# EAGLE board bluepill-knx-transceiver (EAGLE 9.0.1)
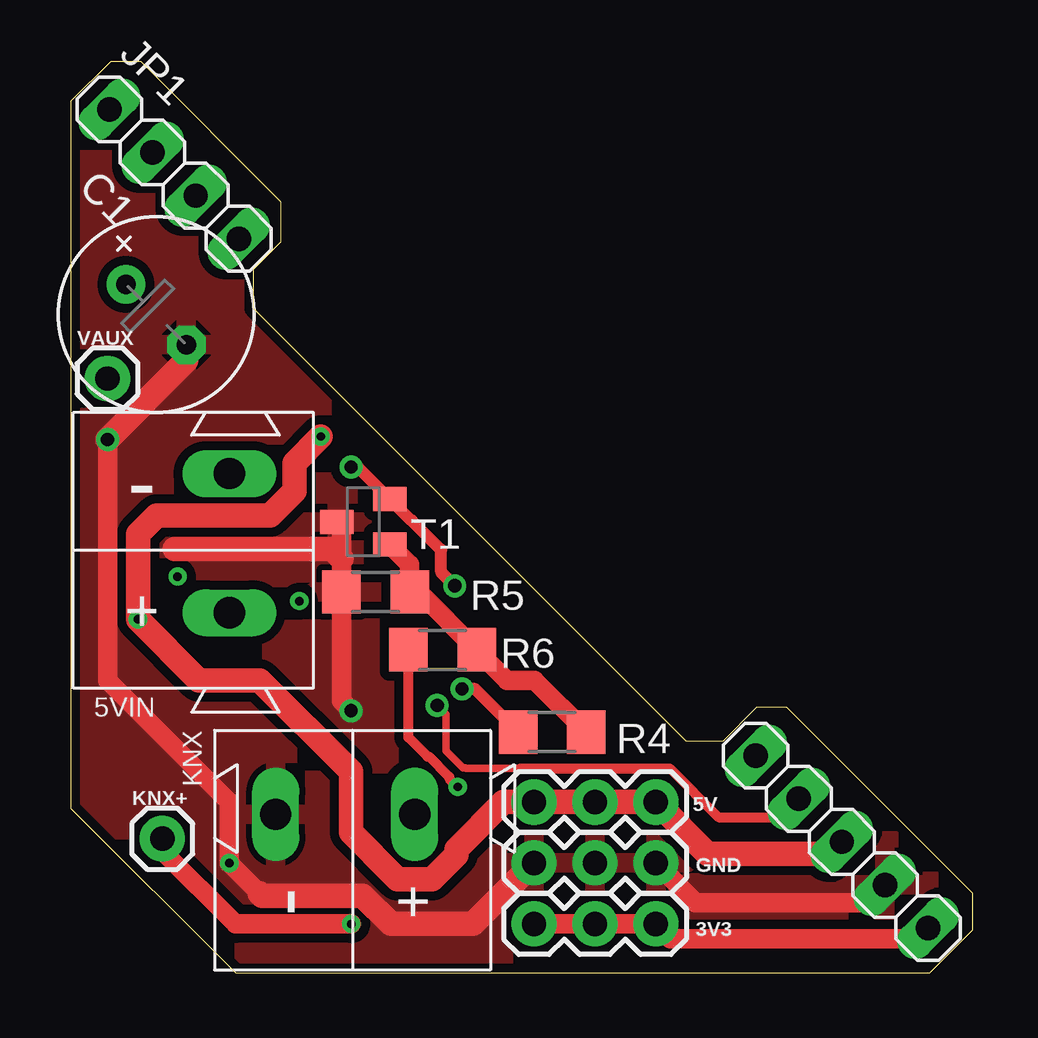
[diagram p0: board, top side]
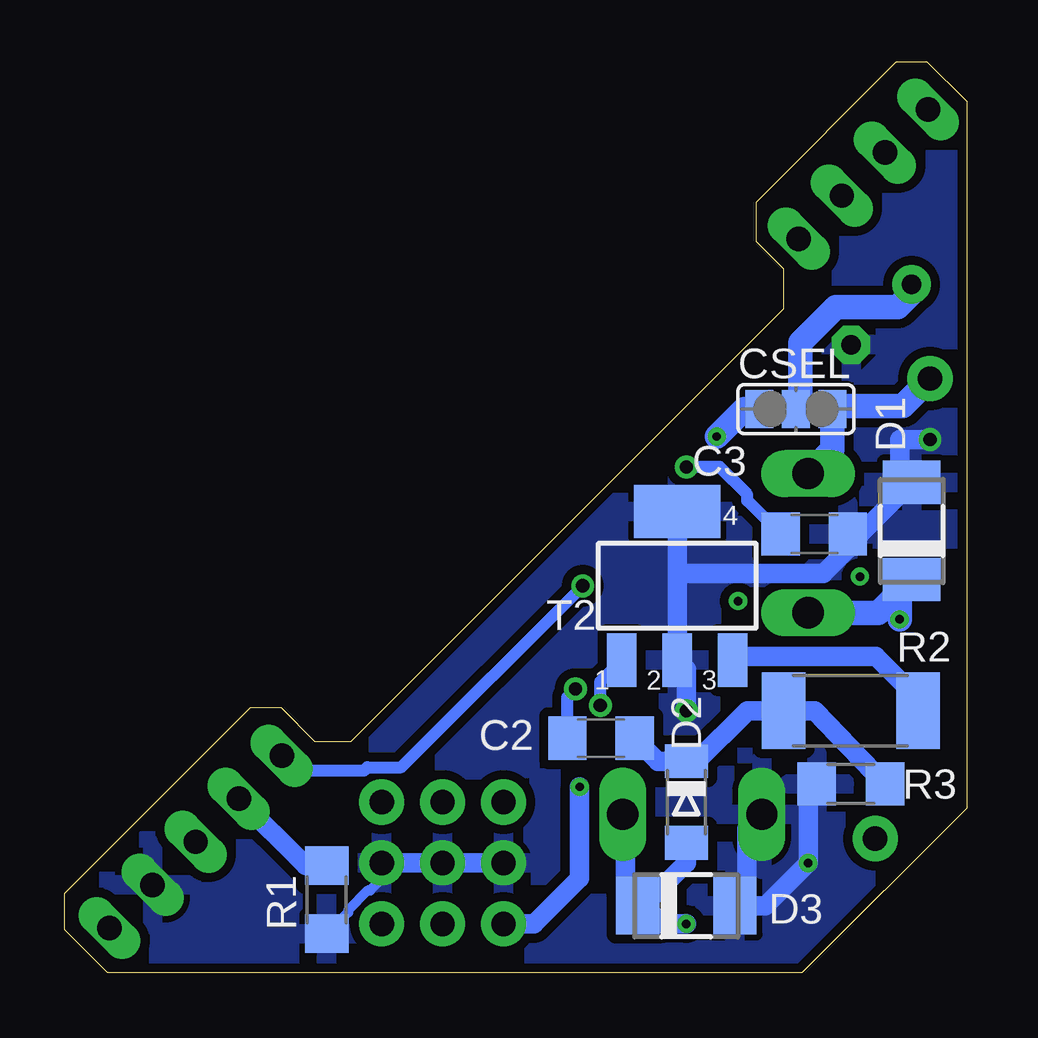
[diagram p1: board, bottom side, seen from below]

Size 37.59 x 37.97 mm. Coordinates in mm from the lower left corner, seen from the top.
Outline: 0,36.32 0,6.86 6.86,0 35.81,0 37.59,1.78 37.59,3.3 29.85,11.05 28.57,11.05 27.18,9.65 25.65,9.65 7.62,27.69 7.62,29.34 8.76,30.48 8.76,32.13 2.92,37.97 1.65,37.97 0,36.32
Copper layers (1*16): Top 0.035mm / dielectric 1.5mm / Bottom 0.035mm
Design rules "default *": minimum track width 10mil, minimum drill 0.35mm, track to track 10mil, track to pad 10mil, pad to pad 10mil, via to via 10mil, smd to smd 10mil, copper to edge 15mil, drill to drill 10mil, minimum pad ring 10mil, minimum via ring 8mil, stop-mask expansion 4mil, vias tented up to drill 100mil, thermal gap 10mil
Net classes: 1 power: width 0.305 mm

## Footprints (pad centres in the part's own frame; a part is rotated, then mirrored left to right if it is on the bottom)
1X03 = drill 1.016 pad 1.88: 1 0,0; 2 2.54,0; 3 5.08,0
WAGO-243-211 = drill 1.3 long: 1+ 0,2.65; 2- 0,-3.15
E3,5-8 = drill 0.813 pad 1.6: + -1.778,0 | drill 0.813 pad 1.6 octagon: - 1.778,0
C1206 = smd 1.6 x 1.8: 1 -1.4,0; 2 1.4,0
SJ_2 = smd 1.168 x 1.6: 1 -1.524,0; 2 0,0; 3 1.524,0
DO-214AC = smd 1.8 x 2.4: A 2.025,0; C -2.025,0
MINIMELF = smd 1.4 x 1.8: A 1.7,0; C -1.7,0
1X20-BP = drill 1.016 long: 1 -24.13,0; 2 -21.59,0; 3 -19.05,0; 4 -16.51,0; 16 13.97,0; 17 16.51,0; 18 19.05,0; 19 21.59,0; 20 24.13,0
1X01 = drill 1.016 pad 1.88: 1 0,0
R1206 = smd 1.6 x 1.803: 1 -1.422,0; 2 1.422,0
R2512 = smd 1.8 x 3.2: 1 -2.8,0; 2 2.8,0
SOT23-BEC = smd 1 x 1.4: B -0.95,-1.1; C 0,1.1; E 0.95,-1.1
SOT223 = smd 1.219 x 2.235: 1 -2.311,-3.099; 2 0,-3.099; 3 2.311,-3.099 | smd 3.6 x 2.2: 4 0,3.099

## Placement (x,y rotation side)
3V3  [1X03]  19.3,2.03 0 top
5V  [1X03]  19.3,7.11 0 top
5VIN  WAGO-243-211  [WAGO-243-211]  6.6,17.65 180 top
C1  [E3,5-8]  3.56,27.43 315 top
C2  100n  [C1206]  15.24,9.78 180 bottom
C3  100p  [C1206]  6.35,18.29 180 bottom
CSEL  [SJ_2]  7.11,23.49 0 bottom
D1  SMAJ5.0CA  [DO-214AC]  2.29,18.41 90 bottom
D2  1N4148  [MINIMELF]  11.68,7.11 270 bottom
D3  SMAJ40CA  [DO-214AC]  11.68,2.79 0 bottom
GND  [1X03]  19.3,4.57 0 top
JP1  [1X20-BP]  18.67,18.92 315 top
KNX  WAGO-243-211  [WAGO-243-211]  11.68,6.6 270 top
KNX+  [1X01]  3.81,5.59 0 top
R1  10k  [R1206]  26.67,3.05 90 bottom
R2  68R 1W  [R2512]  4.83,10.92 180 bottom
R3  100k  [R1206]  4.83,7.87 0 bottom
R4  10k  [R1206]  20.07,10.03 0 top
R5  47k  [R1206]  12.7,15.88 0 top
R6  82k  [R1206]  15.49,13.46 180 top
T1  BC856  [SOT23-BEC]  12.19,18.8 90 top
T2  IRLL110  [SOT223]  12.07,16.13 0 bottom
VAUX  [1X01]  1.52,24.77 0 top

## Library data of the parts
3V3 5V GND KNX+ VAUX = SparkFun-Connectors
5VIN KNX = Connector_for_Selfbus-Projects
C1 = rcl; SPICEPREFIX: C
C2 = rcl; REICHELT: X7R-G0805 100N
C3 = rcl; REICHELT: NPO-G0805 100P
CSEL = jumper
D1 D3 = diode
D2 = diode; REICHELT: 1N 4148 SMD
JP1 = pinhead-1
R1 R5 = rcl; REICHELT: SMD-0805 47,0K
R2 = rcl; SPICEPREFIX: R
R3 = rcl; REICHELT: SMD-0805 100K
R4 = rcl; REICHELT: SMD-0805 10,0K
R6 = rcl; REICHELT: SMD-0805 82,0K
T1 = transistor-pnp; REICHELT: BC 856B SMD
T2 = zetex; OC_FARNELL: unknown; OC_NEWARK: unknown

## Nets
5V: 5V.1 5V.2 5V.3 5VIN.1+ CSEL.1 D1.C JP1.18
+3V3: 3V3.1 3V3.2 3V3.3 JP1.20 R6.2
EIB+ [power]: D2.A D3.C KNX+.1 KNX.1+
GND: C1.- C3.1 D1.A D3.A GND.1 GND.2 GND.3 JP1.19 KNX.2- R1.1 R3.1 R5.1 T1.C T2.2 T2.4
KNX+D: C2.1 D2.C R2.2 R3.2
N$1: C2.2 R4.1
N$2: R2.1 T2.3
N$3: C1.+ CSEL.2
N$14: R4.2 R5.2 R6.1 T1.B
PB8_KNX_RX: C3.2 JP1.16 T1.E
PB9_KNX_TX: JP1.17 R1.2 T2.1
VAUX: 5VIN.2- CSEL.3 VAUX.1

## Tracks (layer width: path | path; a pad name or v marks a point on that pad's centre or on a via)
5V  (via drill 0.35)
  Top 1.016: JP1.18 31.64,4.95 26.54,4.95 5V.3 5V.2 5V.1 18.03,7.11 16.07,5.15 16.07,4.91 15.05,3.89 13.62,3.89 12.6,4.91 12.6,4.93 11.68,5.84 11.68,8.38 7.87,12.19 5.33,12.19 v2.79,14.73 2.79,18.29 3.57,19.07 8.3,19.07 9.32,20.08 9.32,21.25 v10.41,22.35
  Bottom 1.016: v2.79,14.73 2.79,15.88 D1.C 3.67,15 5VIN.1+ | v10.41,22.35 9.27,23.49 CSEL.1
+3V3  (via drill 0.35)
  Top 0.254: 14.41,13.12 R6.2
  Top 0.406: R6.2 14.07,9.8 14.87,9.01 14.93,9.01 15.77,8.17 15.77,8.11 v16.13,7.75
  Top 0.813: JP1.20 35.29,1.42 24.99,1.42 3V3.3 3V3.2 3V3.1
  Bottom 0.813: v16.13,7.75 16.13,3.94 18.03,2.03 3V3.1
EIB+  (via drill 0.35)
  Top 0.813: v11.68,2.03 6.86,2.03 3.81,5.08 KNX+.1
  Bottom 0.813: 13.71,3.31 D3.C | 13.46,2.79 11.68,4.57 D2.A | 13.46,2.79 D3.C | v11.68,2.03 12.7,2.03 13.46,2.79 | KNX.1+ 14.22,6.49 14.22,3.3 D3.C
GND  (via drill 0.35, 0.55)
  Top 0.813: T1.C 11.28,18.61 11.28,17.27 R5.1 11.28,11.33 v11.68,10.92 | 7.87,3.3 v6.6,4.57 6.6,7.11 1.52,12.19 v1.52,22.23 | GND.3 26.04,2.92 33.2,2.92 JP1.19
  Top 1.016: 7.87,3.3 7.98,3.2 12.17,3.2 13.34,2.03 16.76,2.03 GND.1 | v1.52,22.23 4.81,25.51 C1.- | 11.28,17.27 10.9,17.65 4.32,17.65
  Bottom 0.406: GND.3 24.38,3.91 24.87,3.43 24.96,3.43 25.78,2.61 25.78,2.52 R1.1
  Bottom 0.813: GND.3 GND.2 GND.1 | v11.68,10.92 11.68,12.65 T2.2 12.07,16.64 | 12.07,16.64 T2.4 11.05,19.23 | D3.A 9.15,3.3 9.15,5.99 KNX.2- | 10.69,19.23 11.05,19.23 | 9.66,2.55 D3.A | v1.52,22.23 2.79,22.23 2.79,20.95 D1.A 4.44,18.29 C3.1 4.95,17.66 5.97,16.64 8.26,16.64 12.07,16.64 | D3.A 8.38,2.79 v6.6,4.57 6.6,7.64 R3.1 | 10.67,18.85 11.05,19.23
  pour Bottom (isolate 0.381): 0.25,37.59 0.25,0.76 1.52,-0.51 37.08,-0.51 37.08,4.57 37.08,8.38 5.33,40.13 2.79,40.13
  pour Top (isolate 0.381): 0.25,37.59 0.25,-0.51 37.08,-0.51 39.62,2.03 39.62,3.3 39.62,4.57 5.33,38.86 1.52,38.86
KNX+D
  Bottom 0.813: C2.1 12.87,8.81 D2.C 11.25,8.81 9.14,10.92 R2.2 6.33,10.92 R3.2
N$1  (via drill 0.55)
  Top 0.508: R4.1 16.85,11.83 v16.3,11.83
  Bottom 0.508: 16.64,10.48 C2.2 16.64,11.49 v16.3,11.83
N$2
  Bottom 0.813: R2.1 2.03,11.42 3.78,13.18 9.6,13.18 T2.3
N$3
  Bottom 1.016: C1.+ 2.3,28.31 2.87,27.74 5.46,27.74 6.93,26.26 6.93,23.67 CSEL.2
N$4  (via drill 0.35)
  other vias: 4.45,16.51
N$9  (via drill 0.35)
  other vias: 9.52,15.49
N$14
  Top 0.508: R6.1 16.92,13.08
  Top 0.813: T1.B 14.12,17.02 R5.2 14.5,15.88 R6.1 18.19,12.19 19.33,12.19 R4.2
PB8_KNX_RX  (via drill 0.55)
  Top 0.508: v16,16.13 15.43,16.7 15.43,17.63 14.2,18.85 14.18,18.85 T1.E 11.96,21.08 v11.68,21.08
  Bottom 0.508: v16,16.13 23.57,8.56 24.98,8.56 25.13,8.42 27.92,8.42 JP1.16 | C3.2 9.14,19.68 9.14,19.92 10.3,21.08 v11.68,21.08
PB9_KNX_TX  (via drill 0.55)
  Top 0.305: v15.27,11.14 15.64,10.78 15.64,9.24 16.35,8.53 16.45,8.53 16.48,8.51 17.91,8.51 18.03,8.51 18.73,8.51
  Top 0.406: 18.73,8.51 24.96,8.51 26.99,6.48 29.57,6.48 JP1.17
  Bottom 0.508: v15.27,11.14 15.27,12.14 T2.1
  Bottom 0.813: R1.2 27.57,4.47 JP1.17
VAUX
  Bottom 1.016: VAUX.1 2.67,23.62 5.46,23.62 CSEL.3 5.59,21.82 5VIN.2-